# EAGLE board DC Motor Direction Control (EAGLE 6.5.0)
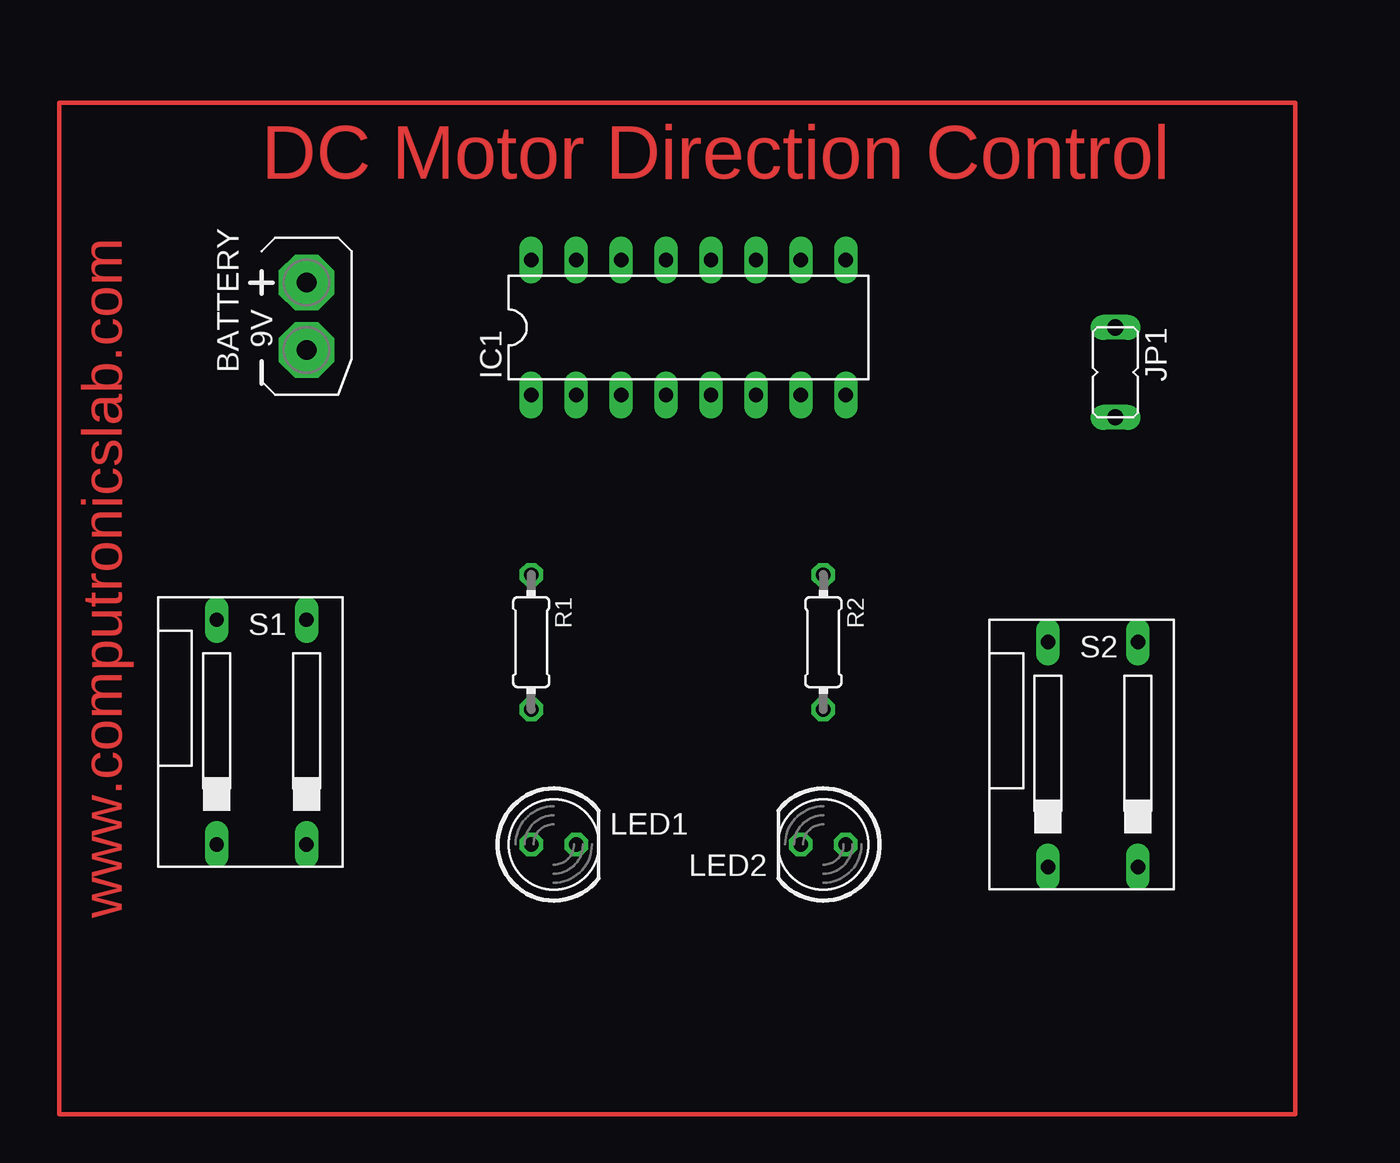
[diagram p0: board, top side]
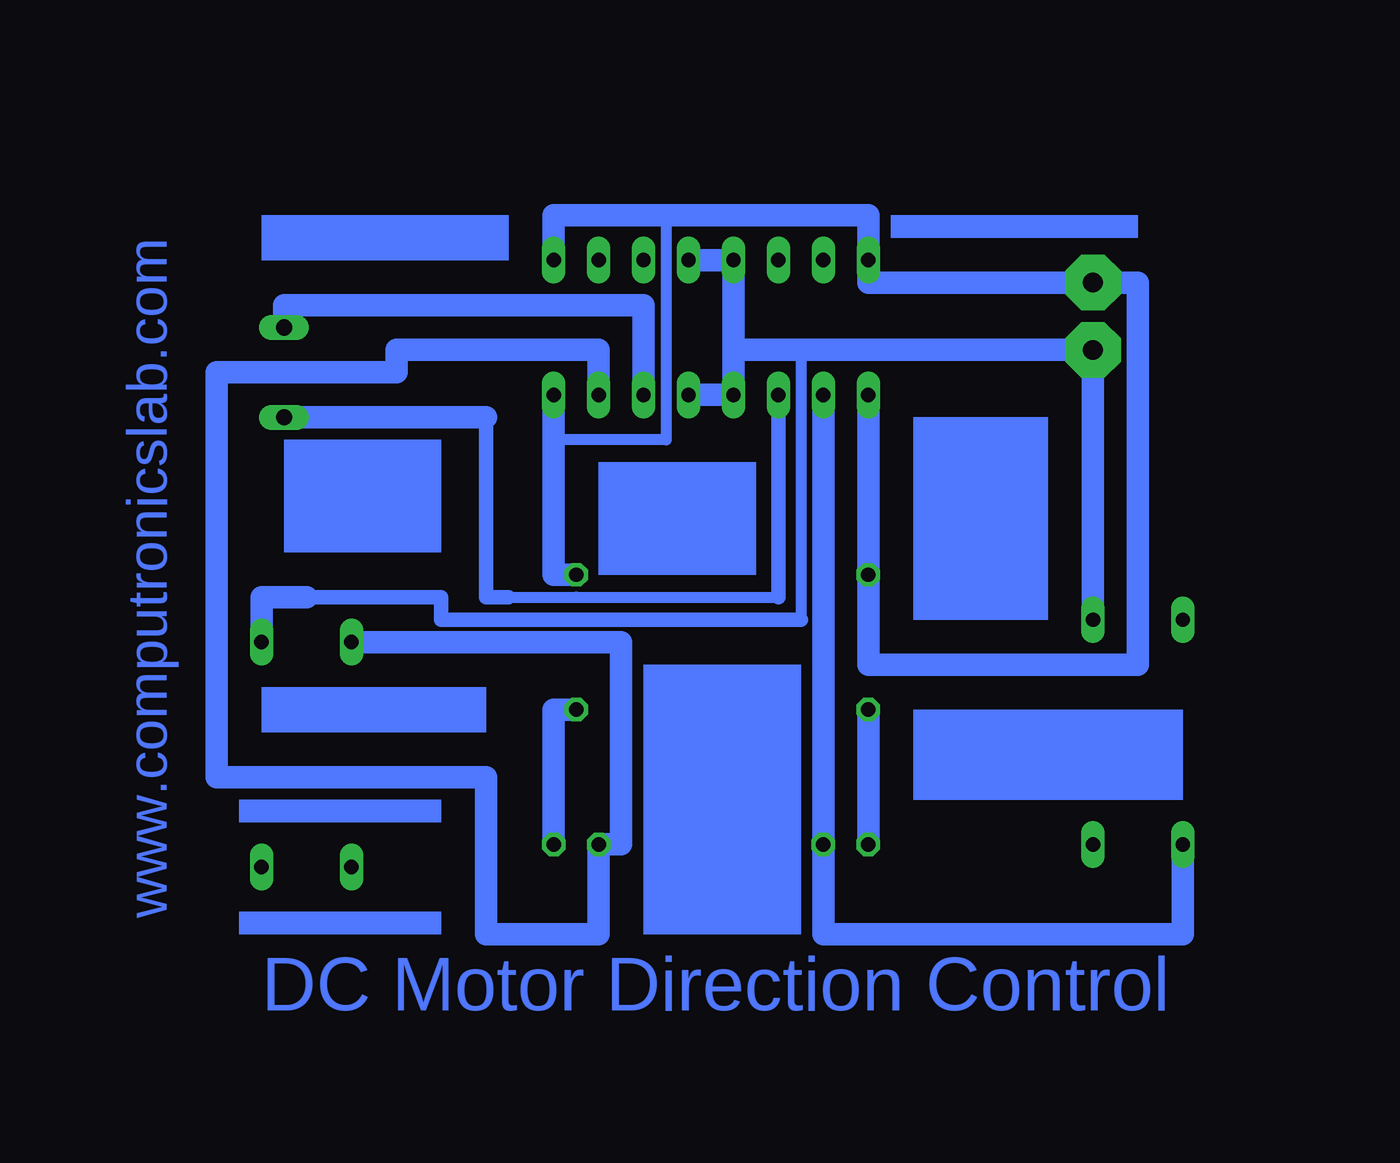
[diagram p1: board, bottom side, seen from below]

No outline drawn. Coordinates in mm, seen from the top.
Copper layers (1*16): Top 0.035mm / dielectric 1.5mm / Bottom 0.035mm
Design rules "default": minimum track width 10mil, minimum drill 24mil, track to track 8mil, track to pad 8mil, pad to pad 8mil, via to via 8mil, smd to smd 8mil, copper to edge 40mil, drill to drill 8mil, minimum pad ring 10mil, minimum via ring 8mil, stop-mask expansion 4mil, vias tented up to drill 0mil, thermal gap 10mil

## Footprints (pad centres in the part's own frame; a part is rotated, then mirrored left to right if it is on the bottom)
AB9V = drill 1.118 pad 3.15 octagon: + 0,2.54; - 0,-1.27
DIL16 = drill 0.813 long: 1 -8.89,-3.81; 2 -6.35,-3.81; 3 -3.81,-3.81; 4 -1.27,-3.81; 5 1.27,-3.81; 6 3.81,-3.81; 7 6.35,-3.81; 8 8.89,-3.81; 9 8.89,3.81; 10 6.35,3.81; 11 3.81,3.81; 12 1.27,3.81; 13 -1.27,3.81; 14 -3.81,3.81; 15 -6.35,3.81; 16 -8.89,3.81
JP1 = drill 0.914 long: 1 0,-2.54; 2 0,2.54
LED5MM = drill 0.813 octagon: A -1.27,0; K 1.27,0
0204/7 = drill 0.813 octagon: 1 -3.81,0; 2 3.81,0
DS-02 = drill 0.813 long: 1 -5.08,-6.35; 2 0,-6.35; 3 0,6.35; 4 -5.08,6.35

## Placement (x,y rotation side)
BATTERY  9V  [AB9V]  13.97,45.72 0 top
IC1  L293D  [DIL16]  35.56,45.72 0 top
JP1  motor  [JP1]  59.69,43.18 180 top
LED1  5mm  [LED5MM]  27.94,16.51 0 top
LED2  5mm  [LED5MM]  43.18,16.51 180 top
R1  330E  [0204/7]  26.67,27.94 270 top
R2  330E  [0204/7]  43.18,27.94 270 top
S1  push switch  [DS-02]  13.97,22.86 0 top
S2  push switch  [DS-02]  60.96,21.59 0 top

## Library data of the parts
BATTERY = battery
IC1 = st-microelectronics; MPN: L293D; OC_FARNELL: 9589619; OC_NEWARK: 56P8249
JP1 = jumper
LED1 LED2 = led
R1 R2 = rcl
S1 S2 = switch-dil; OC_FARNELL: 9472126; OC_NEWARK: unknown

## Nets
N$1: BATTERY.- IC1.4 IC1.5 IC1.12 IC1.13 S1.3 S2.3
N$4: IC1.2 LED1.K S1.1
N$5: BATTERY.+ IC1.1 IC1.8 IC1.9 IC1.16 R1.1 R2.1
N$6: IC1.6 JP1.1
N$9: LED2.A R2.2
N$10: LED1.A R1.2
N$12: IC1.3 JP1.2
N$15: IC1.7 LED2.K S2.4

## Tracks (layer width: path | path; a pad name or v marks a point on that pad's centre or on a via)
N$1
  Bottom 0.61: 30.48,44.45 30.48,29.21
  Bottom 0.813: 58.42,30.48 50.8,30.48 50.8,29.21 30.48,29.21
  Bottom 1.27: IC1.12 IC1.13 34.29,44.45 | IC1.5 IC1.4 34.29,44.45 | S1.3 BATTERY.- 30.48,44.45 34.29,44.45 | 58.42,30.48 60.96,30.48 S2.3
N$2
  Top 0.254: 0,58.42 69.85,58.42 69.85,1.27 0,1.27 0,58.42
N$4
  Bottom 1.27: S1.1 8.89,11.43 29.21,11.43 LED1.K IC1.2
N$5
  Bottom 0.61: 44.45,39.37 38.1,39.37 38.1,52.07
  Bottom 1.27: R2.1 44.45,31.75 IC1.8 44.45,39.37 | IC1.1 R1.1 26.67,26.67 11.43,26.67 11.43,48.26 BATTERY.+ 26.67,48.26 IC1.16 26.67,52.07 38.1,52.07 44.45,52.07 IC1.9
N$6
  Bottom 1.27: IC1.6 39.37,46.99 59.69,46.99 JP1.1
N$9
  Bottom 1.27: LED2.A 44.45,24.13 R2.2
N$10
  Bottom 1.27: R1.2 LED1.A
N$12
  Bottom 0.61: 31.75,30.48 43.18,30.48 46.99,30.48
  Bottom 0.813: 31.75,30.48 IC1.3 | 48.26,40.64 48.26,30.48 46.99,30.48
  Bottom 1.27: 48.26,40.64 57.15,40.64 JP1.2
N$15
  Bottom 1.27: S2.4 40.64,27.94 40.64,16.51 LED2.K 41.91,11.43 48.26,11.43 48.26,20.32 63.5,20.32 63.5,43.18 53.34,43.18 53.34,44.45 41.91,44.45 IC1.7
(copper drawn outside any net)
  shapes: Bottom area x10

## Text on the board
Top: www.computronicslab.com | DC Motor Direction Control
Bottom: www.computronicslab.com | DC Motor Direction Control